# EAGLE board PCA9306_Breakout-Panel-v14 (EAGLE 6.5.0), part 1 of 3
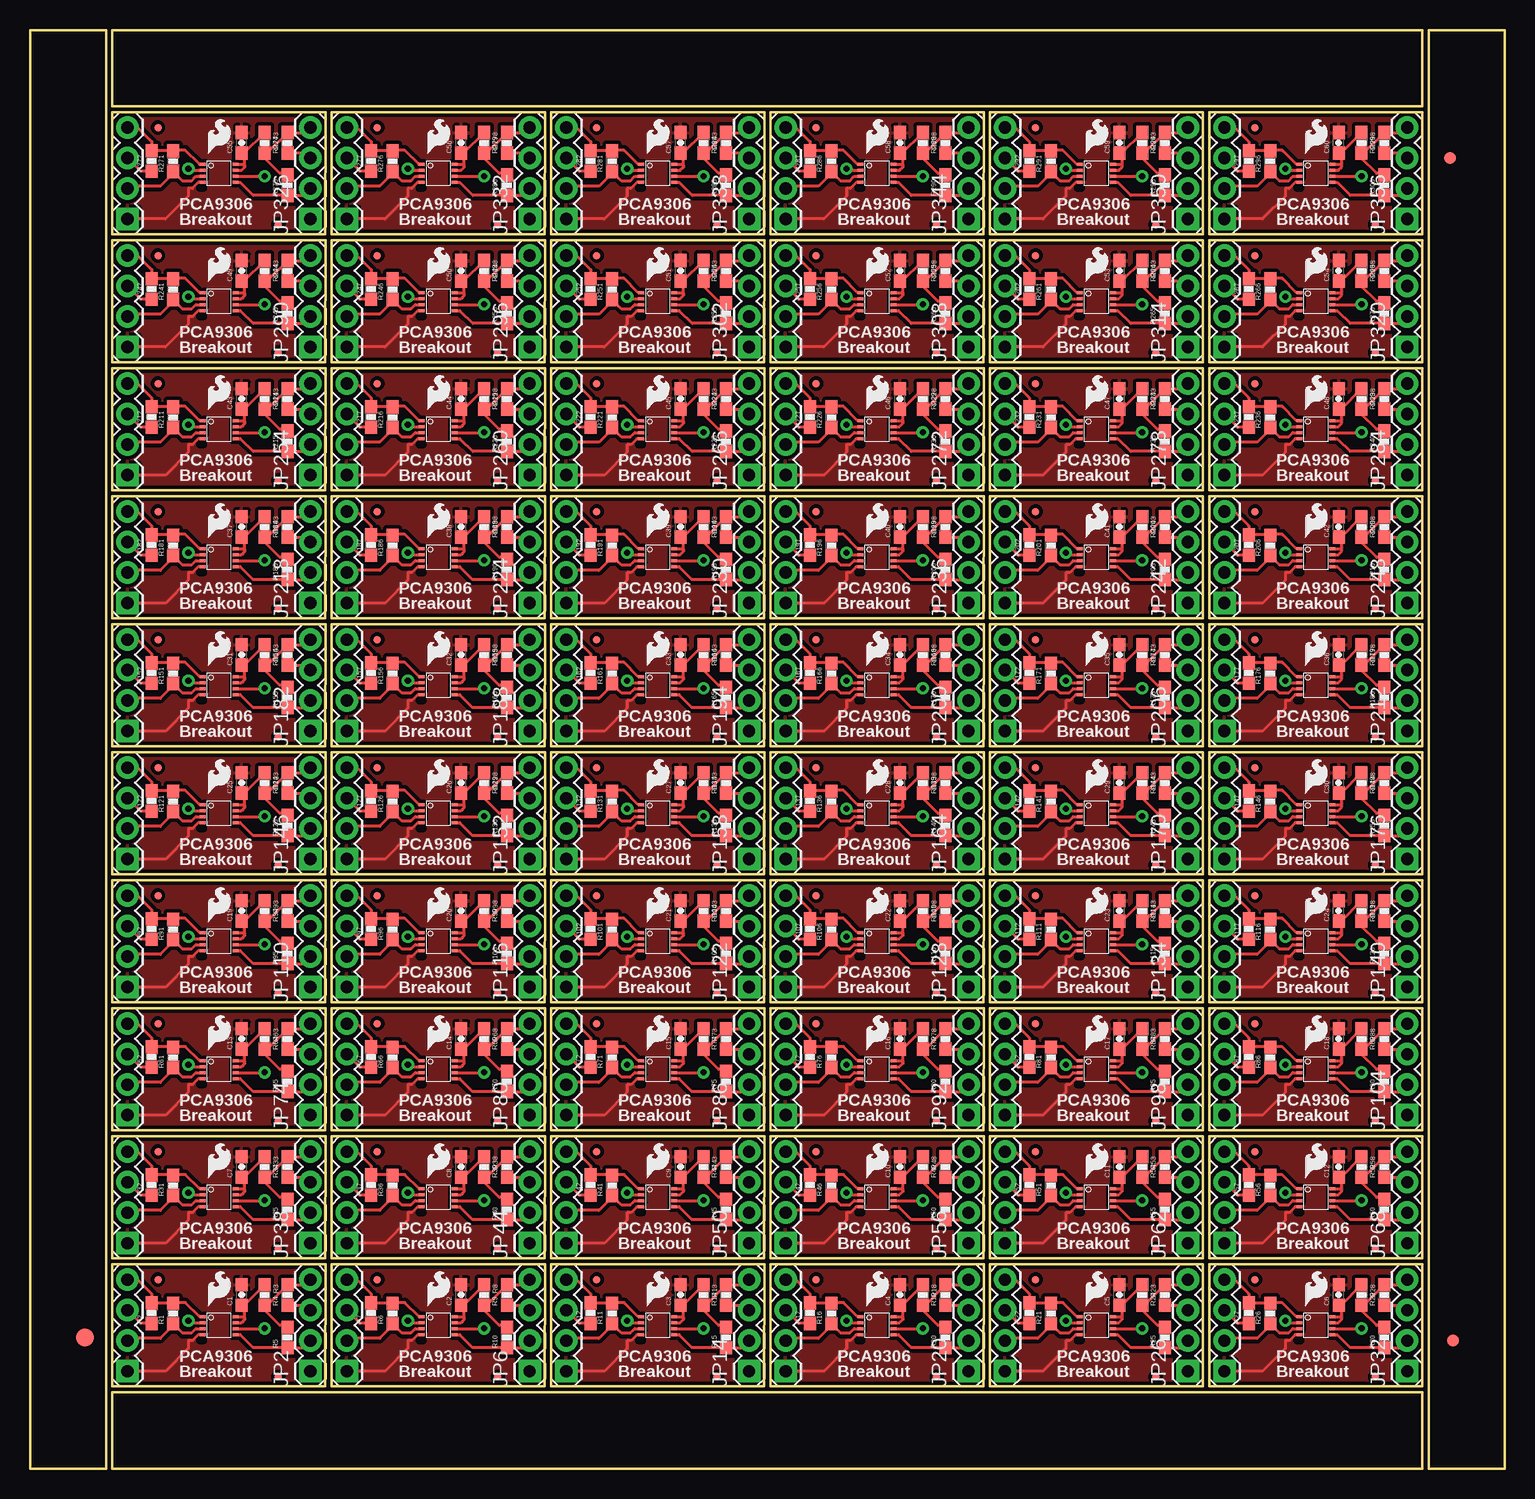
[diagram p0: board, top side]
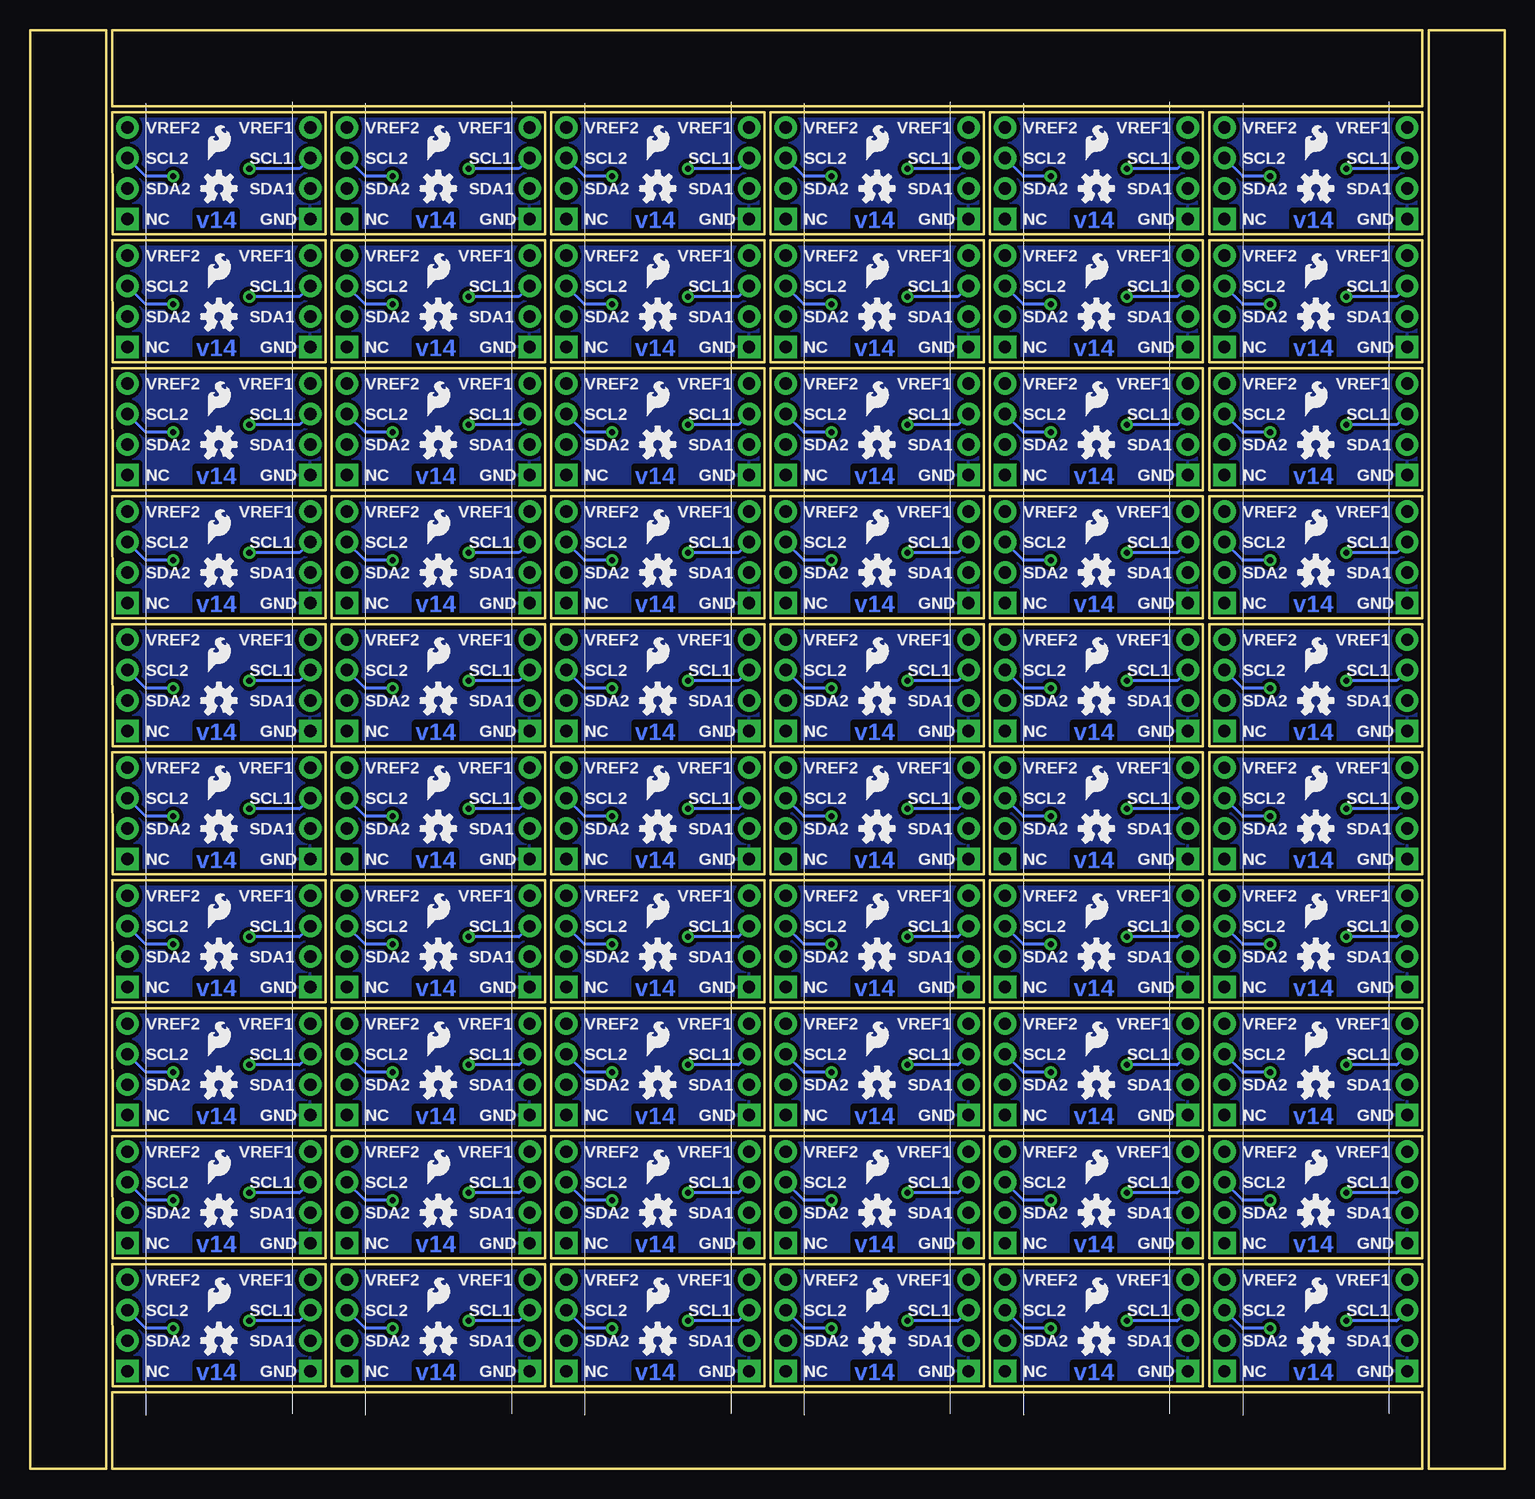
[diagram p1: board, bottom side, seen from below]

Size 122.94 x 119.89 mm. Coordinates in mm from the lower left corner, seen from the top.
Outline: 261 segments
Copper layers (1*16): Top 0.035mm / dielectric 1.5mm / Bottom 0.035mm
Design rules "SparkFun *": minimum track width 8mil, minimum drill 20mil, track to track 8mil, track to pad 8mil, pad to pad 8mil, via to via 8mil, smd to smd 8mil, copper to edge 8mil, drill to drill 8mil, minimum pad ring 12mil, minimum via ring 10mil, stop-mask expansion 4mil, vias tented up to drill 20mil, thermal gap 10mil
tRestrict: area 14.2,10.7 to 14.5,11; area 32.4,10.7 to 32.8,11; area 50.7,10.7 to 51.1,11; area 69,10.7 to 69.3,11; area 87.3,10.7 to 87.6,11; area 105.6,10.7 to 105.9,11; area 14.2,21.3 to 14.5,21.7; area 32.4,21.3 to 32.8,21.7; area 50.7,21.3 to 51.1,21.7; area 69,21.3 to 69.3,21.7; area 87.3,21.3 to 87.6,21.7; area 105.6,21.3 to 105.9,21.7; 48 more areas

## Footprints (pad centres in the part's own frame; a part is rotated, then mirrored left to right if it is on the bottom)
0603-CAP = smd 1.1 x 1: 1 -0.85,0; 2 0.85,0
FIDUCIAL-1.5X3 = smd 1.5 x 1.5: 1 0,0
FIDUCIAL-1X2 = smd 1 x 1: 1 0,0
1X04 = drill 1.016 pad 1.88 square: 1 0,0 | drill 1.016 pad 1.88: 2 2.54,0; 3 5.08,0; 4 7.62,0
FIDUCIAL-1X2.5 = smd 0.635 x 0.635: 1 0,0
0603-RES = smd 1.1 x 1: 1 -0.85,0; 2 0.85,0
PSOP-8 = smd 0.25 x 0.5: 1 -0.73,-1.37; 2 -0.23,-1.37; 3 0.27,-1.37; 4 0.77,-1.37; 5 0.77,1.38; 6 0.27,1.38; 7 -0.23,1.38; 8 -0.73,1.38

## Placement (x,y rotation side)
C1  0.1uF  [0603-CAP]  17.65,14.48 90 top
C2  0.1uF  [0603-CAP]  35.94,14.48 90 top
C3  0.1uF  [0603-CAP]  54.23,14.48 90 top
C4  0.1uF  [0603-CAP]  72.52,14.48 90 top
C5  0.1uF  [0603-CAP]  90.81,14.48 90 top
C6  0.1uF  [0603-CAP]  109.09,14.48 90 top
C7  0.1uF  [0603-CAP]  17.65,25.15 90 top
C8  0.1uF  [0603-CAP]  35.94,25.15 90 top
C9  0.1uF  [0603-CAP]  54.23,25.15 90 top
C10  0.1uF  [0603-CAP]  72.52,25.15 90 top
C11  0.1uF  [0603-CAP]  90.81,25.15 90 top
C12  0.1uF  [0603-CAP]  109.09,25.15 90 top
C13  0.1uF  [0603-CAP]  17.65,35.81 90 top
C14  0.1uF  [0603-CAP]  35.94,35.81 90 top
C15  0.1uF  [0603-CAP]  54.23,35.81 90 top
C16  0.1uF  [0603-CAP]  72.52,35.81 90 top
C17  0.1uF  [0603-CAP]  90.81,35.81 90 top
C18  0.1uF  [0603-CAP]  109.09,35.81 90 top
C19  0.1uF  [0603-CAP]  17.65,46.48 90 top
C20  0.1uF  [0603-CAP]  35.94,46.48 90 top
C21  0.1uF  [0603-CAP]  54.23,46.48 90 top
C22  0.1uF  [0603-CAP]  72.52,46.48 90 top
C23  0.1uF  [0603-CAP]  90.81,46.48 90 top
C24  0.1uF  [0603-CAP]  109.09,46.48 90 top
C25  0.1uF  [0603-CAP]  17.65,57.15 90 top
C26  0.1uF  [0603-CAP]  35.94,57.15 90 top
C27  0.1uF  [0603-CAP]  54.23,57.15 90 top
C28  0.1uF  [0603-CAP]  72.52,57.15 90 top
C29  0.1uF  [0603-CAP]  90.81,57.15 90 top
C30  0.1uF  [0603-CAP]  109.09,57.15 90 top
C31  0.1uF  [0603-CAP]  17.65,67.82 90 top
C32  0.1uF  [0603-CAP]  35.94,67.82 90 top
C33  0.1uF  [0603-CAP]  54.23,67.82 90 top
C34  0.1uF  [0603-CAP]  72.52,67.82 90 top
C35  0.1uF  [0603-CAP]  90.81,67.82 90 top
C36  0.1uF  [0603-CAP]  109.09,67.82 90 top
C37  0.1uF  [0603-CAP]  17.65,78.49 90 top
C38  0.1uF  [0603-CAP]  35.94,78.49 90 top
C39  0.1uF  [0603-CAP]  54.23,78.49 90 top
C40  0.1uF  [0603-CAP]  72.52,78.49 90 top
C41  0.1uF  [0603-CAP]  90.81,78.49 90 top
C42  0.1uF  [0603-CAP]  109.09,78.49 90 top
C43  0.1uF  [0603-CAP]  17.65,89.15 90 top
C44  0.1uF  [0603-CAP]  35.94,89.15 90 top
C45  0.1uF  [0603-CAP]  54.23,89.15 90 top
C46  0.1uF  [0603-CAP]  72.52,89.15 90 top
C47  0.1uF  [0603-CAP]  90.81,89.15 90 top
C48  0.1uF  [0603-CAP]  109.09,89.15 90 top
C49  0.1uF  [0603-CAP]  17.65,99.82 90 top
C50  0.1uF  [0603-CAP]  35.94,99.82 90 top
C51  0.1uF  [0603-CAP]  54.23,99.82 90 top
C52  0.1uF  [0603-CAP]  72.52,99.82 90 top
C53  0.1uF  [0603-CAP]  90.81,99.82 90 top
C54  0.1uF  [0603-CAP]  109.09,99.82 90 top
C55  0.1uF  [0603-CAP]  17.65,110.49 90 top
C56  0.1uF  [0603-CAP]  35.94,110.49 90 top
C57  0.1uF  [0603-CAP]  54.23,110.49 90 top
C58  0.1uF  [0603-CAP]  72.52,110.49 90 top
C59  0.1uF  [0603-CAP]  90.81,110.49 90 top
C60  0.1uF  [0603-CAP]  109.09,110.49 90 top
E$1  [FIDUCIAL-1.5X3]  4.57,10.92 0 top
E$4  [FIDUCIAL-1X2]  118.62,10.67 0 top
E$5  [FIDUCIAL-1X2]  118.36,109.22 180 top
JP1  [1X04]  8.13,8.13 90 top
JP2  [1X04]  23.37,8.13 90 top
JP3  LOGO-SFESK  [SFE-LOGO-FLAME]  14.86,13.59 0 top
JP4  LOGO-SFESK  [SFE-LOGO-FLAME]  16.64,13.08 0 bottom
JP5  [1X04]  26.42,8.13 90 top
JP6  [1X04]  41.66,8.13 90 top
JP7  FIDUCIAL1X2.5  [FIDUCIAL-1X2.5]  10.67,15.75 0 top
JP8  FIDUCIAL1X2.5  [FIDUCIAL-1X2.5]  20.7,7.65 0 top
JP9  LOGO-SFESK  [SFE-LOGO-FLAME]  33.15,13.59 0 top
JP10  LOGO-SFESK  [SFE-LOGO-FLAME]  34.92,13.08 0 bottom
JP11  FIDUCIAL1X2.5  [FIDUCIAL-1X2.5]  28.96,15.75 0 top
JP12  FIDUCIAL1X2.5  [FIDUCIAL-1X2.5]  38.99,7.65 0 top
JP13  [1X04]  44.7,8.13 90 top
JP14  [1X04]  59.94,8.13 90 top
JP15  LOGO-SFESK  [SFE-LOGO-FLAME]  51.43,13.59 0 top
JP16  LOGO-SFESK  [SFE-LOGO-FLAME]  53.21,13.08 0 bottom
JP17  FIDUCIAL1X2.5  [FIDUCIAL-1X2.5]  47.24,15.75 0 top
JP18  FIDUCIAL1X2.5  [FIDUCIAL-1X2.5]  57.28,7.65 0 top
JP19  [1X04]  62.99,8.13 90 top
JP20  [1X04]  78.23,8.13 90 top
JP21  LOGO-SFESK  [SFE-LOGO-FLAME]  69.72,13.59 0 top
JP22  LOGO-SFESK  [SFE-LOGO-FLAME]  71.5,13.08 0 bottom
JP23  FIDUCIAL1X2.5  [FIDUCIAL-1X2.5]  65.53,15.75 0 top
JP24  FIDUCIAL1X2.5  [FIDUCIAL-1X2.5]  75.56,7.65 0 top
JP25  [1X04]  81.28,8.13 90 top
JP26  [1X04]  96.52,8.13 90 top
JP27  LOGO-SFESK  [SFE-LOGO-FLAME]  88.01,13.59 0 top
JP28  LOGO-SFESK  [SFE-LOGO-FLAME]  89.79,13.08 0 bottom
JP29  FIDUCIAL1X2.5  [FIDUCIAL-1X2.5]  83.82,15.75 0 top
JP30  FIDUCIAL1X2.5  [FIDUCIAL-1X2.5]  93.85,7.65 0 top
JP31  [1X04]  99.57,8.13 90 top
JP32  [1X04]  114.81,8.13 90 top
JP33  LOGO-SFESK  [SFE-LOGO-FLAME]  106.3,13.59 0 top
JP34  LOGO-SFESK  [SFE-LOGO-FLAME]  108.08,13.08 0 bottom
JP35  FIDUCIAL1X2.5  [FIDUCIAL-1X2.5]  102.11,15.75 0 top
JP36  FIDUCIAL1X2.5  [FIDUCIAL-1X2.5]  112.14,7.65 0 top
JP37  [1X04]  8.13,18.8 90 top
JP38  [1X04]  23.37,18.8 90 top
JP39  LOGO-SFESK  [SFE-LOGO-FLAME]  14.86,24.26 0 top
JP40  LOGO-SFESK  [SFE-LOGO-FLAME]  16.64,23.75 0 bottom
JP41  FIDUCIAL1X2.5  [FIDUCIAL-1X2.5]  10.67,26.42 0 top
JP42  FIDUCIAL1X2.5  [FIDUCIAL-1X2.5]  20.7,18.32 0 top
JP43  [1X04]  26.42,18.8 90 top
JP44  [1X04]  41.66,18.8 90 top
JP45  LOGO-SFESK  [SFE-LOGO-FLAME]  33.15,24.26 0 top
JP46  LOGO-SFESK  [SFE-LOGO-FLAME]  34.92,23.75 0 bottom
JP47  FIDUCIAL1X2.5  [FIDUCIAL-1X2.5]  28.96,26.42 0 top
JP48  FIDUCIAL1X2.5  [FIDUCIAL-1X2.5]  38.99,18.32 0 top
JP49  [1X04]  44.7,18.8 90 top
JP50  [1X04]  59.94,18.8 90 top
JP51  LOGO-SFESK  [SFE-LOGO-FLAME]  51.43,24.26 0 top
JP52  LOGO-SFESK  [SFE-LOGO-FLAME]  53.21,23.75 0 bottom
JP53  FIDUCIAL1X2.5  [FIDUCIAL-1X2.5]  47.24,26.42 0 top
JP54  FIDUCIAL1X2.5  [FIDUCIAL-1X2.5]  57.28,18.32 0 top
JP55  [1X04]  62.99,18.8 90 top
JP56  [1X04]  78.23,18.8 90 top
JP57  LOGO-SFESK  [SFE-LOGO-FLAME]  69.72,24.26 0 top
JP58  LOGO-SFESK  [SFE-LOGO-FLAME]  71.5,23.75 0 bottom
JP59  FIDUCIAL1X2.5  [FIDUCIAL-1X2.5]  65.53,26.42 0 top
JP60  FIDUCIAL1X2.5  [FIDUCIAL-1X2.5]  75.56,18.32 0 top
JP61  [1X04]  81.28,18.8 90 top
JP62  [1X04]  96.52,18.8 90 top
JP63  LOGO-SFESK  [SFE-LOGO-FLAME]  88.01,24.26 0 top
JP64  LOGO-SFESK  [SFE-LOGO-FLAME]  89.79,23.75 0 bottom
JP65  FIDUCIAL1X2.5  [FIDUCIAL-1X2.5]  83.82,26.42 0 top
JP66  FIDUCIAL1X2.5  [FIDUCIAL-1X2.5]  93.85,18.32 0 top
JP67  [1X04]  99.57,18.8 90 top
JP68  [1X04]  114.81,18.8 90 top
JP69  LOGO-SFESK  [SFE-LOGO-FLAME]  106.3,24.26 0 top
JP70  LOGO-SFESK  [SFE-LOGO-FLAME]  108.08,23.75 0 bottom
JP71  FIDUCIAL1X2.5  [FIDUCIAL-1X2.5]  102.11,26.42 0 top
JP72  FIDUCIAL1X2.5  [FIDUCIAL-1X2.5]  112.14,18.32 0 top
JP73  [1X04]  8.13,29.46 90 top
JP74  [1X04]  23.37,29.46 90 top
JP75  LOGO-SFESK  [SFE-LOGO-FLAME]  14.86,34.92 0 top
JP76  LOGO-SFESK  [SFE-LOGO-FLAME]  16.64,34.42 0 bottom
JP77  FIDUCIAL1X2.5  [FIDUCIAL-1X2.5]  10.67,37.08 0 top
JP78  FIDUCIAL1X2.5  [FIDUCIAL-1X2.5]  20.7,28.99 0 top
JP79  [1X04]  26.42,29.46 90 top
JP80  [1X04]  41.66,29.46 90 top
JP81  LOGO-SFESK  [SFE-LOGO-FLAME]  33.15,34.92 0 top
JP82  LOGO-SFESK  [SFE-LOGO-FLAME]  34.92,34.42 0 bottom
JP83  FIDUCIAL1X2.5  [FIDUCIAL-1X2.5]  28.96,37.08 0 top
JP84  FIDUCIAL1X2.5  [FIDUCIAL-1X2.5]  38.99,28.99 0 top
JP85  [1X04]  44.7,29.46 90 top
JP86  [1X04]  59.94,29.46 90 top
JP87  LOGO-SFESK  [SFE-LOGO-FLAME]  51.43,34.92 0 top
JP88  LOGO-SFESK  [SFE-LOGO-FLAME]  53.21,34.42 0 bottom
JP89  FIDUCIAL1X2.5  [FIDUCIAL-1X2.5]  47.24,37.08 0 top
JP90  FIDUCIAL1X2.5  [FIDUCIAL-1X2.5]  57.28,28.99 0 top
JP91  [1X04]  62.99,29.46 90 top
JP92  [1X04]  78.23,29.46 90 top
JP93  LOGO-SFESK  [SFE-LOGO-FLAME]  69.72,34.92 0 top
JP94  LOGO-SFESK  [SFE-LOGO-FLAME]  71.5,34.42 0 bottom
JP95  FIDUCIAL1X2.5  [FIDUCIAL-1X2.5]  65.53,37.08 0 top
JP96  FIDUCIAL1X2.5  [FIDUCIAL-1X2.5]  75.56,28.99 0 top
JP97  [1X04]  81.28,29.46 90 top
JP98  [1X04]  96.52,29.46 90 top
JP99  LOGO-SFESK  [SFE-LOGO-FLAME]  88.01,34.92 0 top
JP100  LOGO-SFESK  [SFE-LOGO-FLAME]  89.79,34.42 0 bottom
JP101  FIDUCIAL1X2.5  [FIDUCIAL-1X2.5]  83.82,37.08 0 top
JP102  FIDUCIAL1X2.5  [FIDUCIAL-1X2.5]  93.85,28.99 0 top
JP103  [1X04]  99.57,29.46 90 top
JP104  [1X04]  114.81,29.46 90 top
JP105  LOGO-SFESK  [SFE-LOGO-FLAME]  106.3,34.92 0 top
JP106  LOGO-SFESK  [SFE-LOGO-FLAME]  108.08,34.42 0 bottom
JP107  FIDUCIAL1X2.5  [FIDUCIAL-1X2.5]  102.11,37.08 0 top
JP108  FIDUCIAL1X2.5  [FIDUCIAL-1X2.5]  112.14,28.99 0 top
JP109  [1X04]  8.13,40.13 90 top
JP110  [1X04]  23.37,40.13 90 top
JP111  LOGO-SFESK  [SFE-LOGO-FLAME]  14.86,45.59 0 top
JP112  LOGO-SFESK  [SFE-LOGO-FLAME]  16.64,45.08 0 bottom
JP113  FIDUCIAL1X2.5  [FIDUCIAL-1X2.5]  10.67,47.75 0 top
JP114  FIDUCIAL1X2.5  [FIDUCIAL-1X2.5]  20.7,39.66 0 top
JP115  [1X04]  26.42,40.13 90 top
JP116  [1X04]  41.66,40.13 90 top
JP117  LOGO-SFESK  [SFE-LOGO-FLAME]  33.15,45.59 0 top
JP118  LOGO-SFESK  [SFE-LOGO-FLAME]  34.92,45.08 0 bottom
JP119  FIDUCIAL1X2.5  [FIDUCIAL-1X2.5]  28.96,47.75 0 top
JP120  FIDUCIAL1X2.5  [FIDUCIAL-1X2.5]  38.99,39.66 0 top
JP121  [1X04]  44.7,40.13 90 top
JP122  [1X04]  59.94,40.13 90 top
JP123  LOGO-SFESK  [SFE-LOGO-FLAME]  51.43,45.59 0 top
JP124  LOGO-SFESK  [SFE-LOGO-FLAME]  53.21,45.08 0 bottom
JP125  FIDUCIAL1X2.5  [FIDUCIAL-1X2.5]  47.24,47.75 0 top
JP126  FIDUCIAL1X2.5  [FIDUCIAL-1X2.5]  57.28,39.66 0 top
JP127  [1X04]  62.99,40.13 90 top
JP128  [1X04]  78.23,40.13 90 top
JP129  LOGO-SFESK  [SFE-LOGO-FLAME]  69.72,45.59 0 top
JP130  LOGO-SFESK  [SFE-LOGO-FLAME]  71.5,45.08 0 bottom
JP131  FIDUCIAL1X2.5  [FIDUCIAL-1X2.5]  65.53,47.75 0 top
JP132  FIDUCIAL1X2.5  [FIDUCIAL-1X2.5]  75.56,39.66 0 top
JP133  [1X04]  81.28,40.13 90 top
JP134  [1X04]  96.52,40.13 90 top
JP135  LOGO-SFESK  [SFE-LOGO-FLAME]  88.01,45.59 0 top
JP136  LOGO-SFESK  [SFE-LOGO-FLAME]  89.79,45.08 0 bottom
JP137  FIDUCIAL1X2.5  [FIDUCIAL-1X2.5]  83.82,47.75 0 top
JP138  FIDUCIAL1X2.5  [FIDUCIAL-1X2.5]  93.85,39.66 0 top
JP139  [1X04]  99.57,40.13 90 top
JP140  [1X04]  114.81,40.13 90 top
JP141  LOGO-SFESK  [SFE-LOGO-FLAME]  106.3,45.59 0 top
JP142  LOGO-SFESK  [SFE-LOGO-FLAME]  108.08,45.08 0 bottom
JP143  FIDUCIAL1X2.5  [FIDUCIAL-1X2.5]  102.11,47.75 0 top
JP144  FIDUCIAL1X2.5  [FIDUCIAL-1X2.5]  112.14,39.66 0 top
JP145  [1X04]  8.13,50.8 90 top
JP146  [1X04]  23.37,50.8 90 top
JP147  LOGO-SFESK  [SFE-LOGO-FLAME]  14.86,56.26 0 top
JP148  LOGO-SFESK  [SFE-LOGO-FLAME]  16.64,55.75 0 bottom
JP149  FIDUCIAL1X2.5  [FIDUCIAL-1X2.5]  10.67,58.42 0 top
JP150  FIDUCIAL1X2.5  [FIDUCIAL-1X2.5]  20.7,50.32 0 top
JP151  [1X04]  26.42,50.8 90 top
JP152  [1X04]  41.66,50.8 90 top
JP153  LOGO-SFESK  [SFE-LOGO-FLAME]  33.15,56.26 0 top
JP154  LOGO-SFESK  [SFE-LOGO-FLAME]  34.92,55.75 0 bottom
JP155  FIDUCIAL1X2.5  [FIDUCIAL-1X2.5]  28.96,58.42 0 top
JP156  FIDUCIAL1X2.5  [FIDUCIAL-1X2.5]  38.99,50.32 0 top
JP157  [1X04]  44.7,50.8 90 top
JP158  [1X04]  59.94,50.8 90 top
JP159  LOGO-SFESK  [SFE-LOGO-FLAME]  51.43,56.26 0 top
JP160  LOGO-SFESK  [SFE-LOGO-FLAME]  53.21,55.75 0 bottom
JP161  FIDUCIAL1X2.5  [FIDUCIAL-1X2.5]  47.24,58.42 0 top
JP162  FIDUCIAL1X2.5  [FIDUCIAL-1X2.5]  57.28,50.32 0 top
JP163  [1X04]  62.99,50.8 90 top
JP164  [1X04]  78.23,50.8 90 top
JP165  LOGO-SFESK  [SFE-LOGO-FLAME]  69.72,56.26 0 top
JP166  LOGO-SFESK  [SFE-LOGO-FLAME]  71.5,55.75 0 bottom
JP167  FIDUCIAL1X2.5  [FIDUCIAL-1X2.5]  65.53,58.42 0 top
JP168  FIDUCIAL1X2.5  [FIDUCIAL-1X2.5]  75.56,50.32 0 top
JP169  [1X04]  81.28,50.8 90 top
JP170  [1X04]  96.52,50.8 90 top
JP171  LOGO-SFESK  [SFE-LOGO-FLAME]  88.01,56.26 0 top
JP172  LOGO-SFESK  [SFE-LOGO-FLAME]  89.79,55.75 0 bottom
JP173  FIDUCIAL1X2.5  [FIDUCIAL-1X2.5]  83.82,58.42 0 top
JP174  FIDUCIAL1X2.5  [FIDUCIAL-1X2.5]  93.85,50.32 0 top
JP175  [1X04]  99.57,50.8 90 top
JP176  [1X04]  114.81,50.8 90 top
JP177  LOGO-SFESK  [SFE-LOGO-FLAME]  106.3,56.26 0 top
JP178  LOGO-SFESK  [SFE-LOGO-FLAME]  108.08,55.75 0 bottom
JP179  FIDUCIAL1X2.5  [FIDUCIAL-1X2.5]  102.11,58.42 0 top
JP180  FIDUCIAL1X2.5  [FIDUCIAL-1X2.5]  112.14,50.32 0 top
JP181  [1X04]  8.13,61.47 90 top
JP182  [1X04]  23.37,61.47 90 top
JP183  LOGO-SFESK  [SFE-LOGO-FLAME]  14.86,66.93 0 top
JP184  LOGO-SFESK  [SFE-LOGO-FLAME]  16.64,66.42 0 bottom
JP185  FIDUCIAL1X2.5  [FIDUCIAL-1X2.5]  10.67,69.09 0 top
JP186  FIDUCIAL1X2.5  [FIDUCIAL-1X2.5]  20.7,60.99 0 top
JP187  [1X04]  26.42,61.47 90 top
JP188  [1X04]  41.66,61.47 90 top
JP189  LOGO-SFESK  [SFE-LOGO-FLAME]  33.15,66.93 0 top
JP190  LOGO-SFESK  [SFE-LOGO-FLAME]  34.92,66.42 0 bottom
JP191  FIDUCIAL1X2.5  [FIDUCIAL-1X2.5]  28.96,69.09 0 top
JP192  FIDUCIAL1X2.5  [FIDUCIAL-1X2.5]  38.99,60.99 0 top
JP193  [1X04]  44.7,61.47 90 top
JP194  [1X04]  59.94,61.47 90 top
JP195  LOGO-SFESK  [SFE-LOGO-FLAME]  51.43,66.93 0 top
JP196  LOGO-SFESK  [SFE-LOGO-FLAME]  53.21,66.42 0 bottom
JP197  FIDUCIAL1X2.5  [FIDUCIAL-1X2.5]  47.24,69.09 0 top
JP198  FIDUCIAL1X2.5  [FIDUCIAL-1X2.5]  57.28,60.99 0 top
JP199  [1X04]  62.99,61.47 90 top
JP200  [1X04]  78.23,61.47 90 top
JP201  LOGO-SFESK  [SFE-LOGO-FLAME]  69.72,66.93 0 top
JP202  LOGO-SFESK  [SFE-LOGO-FLAME]  71.5,66.42 0 bottom
JP203  FIDUCIAL1X2.5  [FIDUCIAL-1X2.5]  65.53,69.09 0 top
JP204  FIDUCIAL1X2.5  [FIDUCIAL-1X2.5]  75.56,60.99 0 top
JP205  [1X04]  81.28,61.47 90 top
JP206  [1X04]  96.52,61.47 90 top
JP207  LOGO-SFESK  [SFE-LOGO-FLAME]  88.01,66.93 0 top
JP208  LOGO-SFESK  [SFE-LOGO-FLAME]  89.79,66.42 0 bottom
JP209  FIDUCIAL1X2.5  [FIDUCIAL-1X2.5]  83.82,69.09 0 top
JP210  FIDUCIAL1X2.5  [FIDUCIAL-1X2.5]  93.85,60.99 0 top
JP211  [1X04]  99.57,61.47 90 top
JP212  [1X04]  114.81,61.47 90 top
JP213  LOGO-SFESK  [SFE-LOGO-FLAME]  106.3,66.93 0 top
JP214  LOGO-SFESK  [SFE-LOGO-FLAME]  108.08,66.42 0 bottom
JP215  FIDUCIAL1X2.5  [FIDUCIAL-1X2.5]  102.11,69.09 0 top
JP216  FIDUCIAL1X2.5  [FIDUCIAL-1X2.5]  112.14,60.99 0 top
JP217  [1X04]  8.13,72.14 90 top
JP218  [1X04]  23.37,72.14 90 top
JP219  LOGO-SFESK  [SFE-LOGO-FLAME]  14.86,77.6 0 top
JP220  LOGO-SFESK  [SFE-LOGO-FLAME]  16.64,77.09 0 bottom
JP221  FIDUCIAL1X2.5  [FIDUCIAL-1X2.5]  10.67,79.76 0 top
JP222  FIDUCIAL1X2.5  [FIDUCIAL-1X2.5]  20.7,71.66 0 top
JP223  [1X04]  26.42,72.14 90 top
JP224  [1X04]  41.66,72.14 90 top
JP225  LOGO-SFESK  [SFE-LOGO-FLAME]  33.15,77.6 0 top
JP226  LOGO-SFESK  [SFE-LOGO-FLAME]  34.92,77.09 0 bottom
JP227  FIDUCIAL1X2.5  [FIDUCIAL-1X2.5]  28.96,79.76 0 top
JP228  FIDUCIAL1X2.5  [FIDUCIAL-1X2.5]  38.99,71.66 0 top
JP229  [1X04]  44.7,72.14 90 top
JP230  [1X04]  59.94,72.14 90 top
JP231  LOGO-SFESK  [SFE-LOGO-FLAME]  51.43,77.6 0 top
JP232  LOGO-SFESK  [SFE-LOGO-FLAME]  53.21,77.09 0 bottom
JP233  FIDUCIAL1X2.5  [FIDUCIAL-1X2.5]  47.24,79.76 0 top
JP234  FIDUCIAL1X2.5  [FIDUCIAL-1X2.5]  57.28,71.66 0 top
JP235  [1X04]  62.99,72.14 90 top
JP236  [1X04]  78.23,72.14 90 top
JP237  LOGO-SFESK  [SFE-LOGO-FLAME]  69.72,77.6 0 top
JP238  LOGO-SFESK  [SFE-LOGO-FLAME]  71.5,77.09 0 bottom
JP239  FIDUCIAL1X2.5  [FIDUCIAL-1X2.5]  65.53,79.76 0 top
JP240  FIDUCIAL1X2.5  [FIDUCIAL-1X2.5]  75.56,71.66 0 top
JP241  [1X04]  81.28,72.14 90 top
JP242  [1X04]  96.52,72.14 90 top
JP243  LOGO-SFESK  [SFE-LOGO-FLAME]  88.01,77.6 0 top
JP244  LOGO-SFESK  [SFE-LOGO-FLAME]  89.79,77.09 0 bottom
JP245  FIDUCIAL1X2.5  [FIDUCIAL-1X2.5]  83.82,79.76 0 top
JP246  FIDUCIAL1X2.5  [FIDUCIAL-1X2.5]  93.85,71.66 0 top
JP247  [1X04]  99.57,72.14 90 top
JP248  [1X04]  114.81,72.14 90 top
JP249  LOGO-SFESK  [SFE-LOGO-FLAME]  106.3,77.6 0 top
JP250  LOGO-SFESK  [SFE-LOGO-FLAME]  108.08,77.09 0 bottom
JP251  FIDUCIAL1X2.5  [FIDUCIAL-1X2.5]  102.11,79.76 0 top
JP252  FIDUCIAL1X2.5  [FIDUCIAL-1X2.5]  112.14,71.66 0 top
JP253  [1X04]  8.13,82.8 90 top
JP254  [1X04]  23.37,82.8 90 top
JP255  LOGO-SFESK  [SFE-LOGO-FLAME]  14.86,88.27 0 top
JP256  LOGO-SFESK  [SFE-LOGO-FLAME]  16.64,87.76 0 bottom
JP257  FIDUCIAL1X2.5  [FIDUCIAL-1X2.5]  10.67,90.42 0 top
JP258  FIDUCIAL1X2.5  [FIDUCIAL-1X2.5]  20.7,82.33 0 top
JP259  [1X04]  26.42,82.8 90 top
JP260  [1X04]  41.66,82.8 90 top
JP261  LOGO-SFESK  [SFE-LOGO-FLAME]  33.15,88.27 0 top
JP262  LOGO-SFESK  [SFE-LOGO-FLAME]  34.92,87.76 0 bottom
JP263  FIDUCIAL1X2.5  [FIDUCIAL-1X2.5]  28.96,90.42 0 top
JP264  FIDUCIAL1X2.5  [FIDUCIAL-1X2.5]  38.99,82.33 0 top
JP265  [1X04]  44.7,82.8 90 top
JP266  [1X04]  59.94,82.8 90 top
JP267  LOGO-SFESK  [SFE-LOGO-FLAME]  51.43,88.27 0 top
JP268  LOGO-SFESK  [SFE-LOGO-FLAME]  53.21,87.76 0 bottom
JP269  FIDUCIAL1X2.5  [FIDUCIAL-1X2.5]  47.24,90.42 0 top
JP270  FIDUCIAL1X2.5  [FIDUCIAL-1X2.5]  57.28,82.33 0 top
JP271  [1X04]  62.99,82.8 90 top
JP272  [1X04]  78.23,82.8 90 top
JP273  LOGO-SFESK  [SFE-LOGO-FLAME]  69.72,88.27 0 top
JP274  LOGO-SFESK  [SFE-LOGO-FLAME]  71.5,87.76 0 bottom
JP275  FIDUCIAL1X2.5  [FIDUCIAL-1X2.5]  65.53,90.42 0 top
JP276  FIDUCIAL1X2.5  [FIDUCIAL-1X2.5]  75.56,82.33 0 top
JP277  [1X04]  81.28,82.8 90 top
JP278  [1X04]  96.52,82.8 90 top
JP279  LOGO-SFESK  [SFE-LOGO-FLAME]  88.01,88.27 0 top
JP280  LOGO-SFESK  [SFE-LOGO-FLAME]  89.79,87.76 0 bottom
JP281  FIDUCIAL1X2.5  [FIDUCIAL-1X2.5]  83.82,90.42 0 top
JP282  FIDUCIAL1X2.5  [FIDUCIAL-1X2.5]  93.85,82.33 0 top
JP283  [1X04]  99.57,82.8 90 top
JP284  [1X04]  114.81,82.8 90 top
JP285  LOGO-SFESK  [SFE-LOGO-FLAME]  106.3,88.27 0 top
JP286  LOGO-SFESK  [SFE-LOGO-FLAME]  108.08,87.76 0 bottom
JP287  FIDUCIAL1X2.5  [FIDUCIAL-1X2.5]  102.11,90.42 0 top
JP288  FIDUCIAL1X2.5  [FIDUCIAL-1X2.5]  112.14,82.33 0 top
JP289  [1X04]  8.13,93.47 90 top
JP290  [1X04]  23.37,93.47 90 top
JP291  LOGO-SFESK  [SFE-LOGO-FLAME]  14.86,98.93 0 top
JP292  LOGO-SFESK  [SFE-LOGO-FLAME]  16.64,98.42 0 bottom
JP293  FIDUCIAL1X2.5  [FIDUCIAL-1X2.5]  10.67,101.09 0 top
JP294  FIDUCIAL1X2.5  [FIDUCIAL-1X2.5]  20.7,93 0 top
JP295  [1X04]  26.42,93.47 90 top
JP296  [1X04]  41.66,93.47 90 top
JP297  LOGO-SFESK  [SFE-LOGO-FLAME]  33.15,98.93 0 top
JP298  LOGO-SFESK  [SFE-LOGO-FLAME]  34.92,98.42 0 bottom
JP299  FIDUCIAL1X2.5  [FIDUCIAL-1X2.5]  28.96,101.09 0 top
JP300  FIDUCIAL1X2.5  [FIDUCIAL-1X2.5]  38.99,93 0 top
JP301  [1X04]  44.7,93.47 90 top
JP302  [1X04]  59.94,93.47 90 top
JP303  LOGO-SFESK  [SFE-LOGO-FLAME]  51.43,98.93 0 top
JP304  LOGO-SFESK  [SFE-LOGO-FLAME]  53.21,98.42 0 bottom
JP305  FIDUCIAL1X2.5  [FIDUCIAL-1X2.5]  47.24,101.09 0 top
JP306  FIDUCIAL1X2.5  [FIDUCIAL-1X2.5]  57.28,93 0 top
JP307  [1X04]  62.99,93.47 90 top
JP308  [1X04]  78.23,93.47 90 top
JP309  LOGO-SFESK  [SFE-LOGO-FLAME]  69.72,98.93 0 top
JP310  LOGO-SFESK  [SFE-LOGO-FLAME]  71.5,98.42 0 bottom
JP311  FIDUCIAL1X2.5  [FIDUCIAL-1X2.5]  65.53,101.09 0 top
JP312  FIDUCIAL1X2.5  [FIDUCIAL-1X2.5]  75.56,93 0 top
JP313  [1X04]  81.28,93.47 90 top
JP314  [1X04]  96.52,93.47 90 top
JP315  LOGO-SFESK  [SFE-LOGO-FLAME]  88.01,98.93 0 top
JP316  LOGO-SFESK  [SFE-LOGO-FLAME]  89.79,98.42 0 bottom
JP317  FIDUCIAL1X2.5  [FIDUCIAL-1X2.5]  83.82,101.09 0 top
JP318  FIDUCIAL1X2.5  [FIDUCIAL-1X2.5]  93.85,93 0 top
JP319  [1X04]  99.57,93.47 90 top
JP320  [1X04]  114.81,93.47 90 top
JP321  LOGO-SFESK  [SFE-LOGO-FLAME]  106.3,98.93 0 top
JP322  LOGO-SFESK  [SFE-LOGO-FLAME]  108.08,98.42 0 bottom
JP323  FIDUCIAL1X2.5  [FIDUCIAL-1X2.5]  102.11,101.09 0 top
JP324  FIDUCIAL1X2.5  [FIDUCIAL-1X2.5]  112.14,93 0 top
JP325  [1X04]  8.13,104.14 90 top
JP326  [1X04]  23.37,104.14 90 top
JP327  LOGO-SFESK  [SFE-LOGO-FLAME]  14.86,109.6 0 top
JP328  LOGO-SFESK  [SFE-LOGO-FLAME]  16.64,109.09 0 bottom
JP329  FIDUCIAL1X2.5  [FIDUCIAL-1X2.5]  10.67,111.76 0 top
JP330  FIDUCIAL1X2.5  [FIDUCIAL-1X2.5]  20.7,103.66 0 top
JP331  [1X04]  26.42,104.14 90 top
JP332  [1X04]  41.66,104.14 90 top
JP333  LOGO-SFESK  [SFE-LOGO-FLAME]  33.15,109.6 0 top
JP334  LOGO-SFESK  [SFE-LOGO-FLAME]  34.92,109.09 0 bottom
JP335  FIDUCIAL1X2.5  [FIDUCIAL-1X2.5]  28.96,111.76 0 top
JP336  FIDUCIAL1X2.5  [FIDUCIAL-1X2.5]  38.99,103.66 0 top
JP337  [1X04]  44.7,104.14 90 top
JP338  [1X04]  59.94,104.14 90 top
JP339  LOGO-SFESK  [SFE-LOGO-FLAME]  51.43,109.6 0 top
JP340  LOGO-SFESK  [SFE-LOGO-FLAME]  53.21,109.09 0 bottom
JP341  FIDUCIAL1X2.5  [FIDUCIAL-1X2.5]  47.24,111.76 0 top
JP342  FIDUCIAL1X2.5  [FIDUCIAL-1X2.5]  57.28,103.66 0 top
JP343  [1X04]  62.99,104.14 90 top
JP344  [1X04]  78.23,104.14 90 top
JP345  LOGO-SFESK  [SFE-LOGO-FLAME]  69.72,109.6 0 top
JP346  LOGO-SFESK  [SFE-LOGO-FLAME]  71.5,109.09 0 bottom
JP347  FIDUCIAL1X2.5  [FIDUCIAL-1X2.5]  65.53,111.76 0 top
JP348  FIDUCIAL1X2.5  [FIDUCIAL-1X2.5]  75.56,103.66 0 top
JP349  [1X04]  81.28,104.14 90 top
JP350  [1X04]  96.52,104.14 90 top
JP351  LOGO-SFESK  [SFE-LOGO-FLAME]  88.01,109.6 0 top
JP352  LOGO-SFESK  [SFE-LOGO-FLAME]  89.79,109.09 0 bottom
JP353  FIDUCIAL1X2.5  [FIDUCIAL-1X2.5]  83.82,111.76 0 top
JP354  FIDUCIAL1X2.5  [FIDUCIAL-1X2.5]  93.85,103.66 0 top
JP355  [1X04]  99.57,104.14 90 top
JP356  [1X04]  114.81,104.14 90 top
JP357  LOGO-SFESK  [SFE-LOGO-FLAME]  106.3,109.6 0 top
JP358  LOGO-SFESK  [SFE-LOGO-FLAME]  108.08,109.09 0 bottom
JP359  FIDUCIAL1X2.5  [FIDUCIAL-1X2.5]  102.11,111.76 0 top
JP360  FIDUCIAL1X2.5  [FIDUCIAL-1X2.5]  112.14,103.66 0 top
LOGO1  OSHW-LOGOS  [OSHW-LOGO-S]  15.75,10.67 0 bottom
LOGO2  OSHW-LOGOS  [OSHW-LOGO-S]  34.04,10.67 0 bottom
LOGO3  OSHW-LOGOS  [OSHW-LOGO-S]  52.32,10.67 0 bottom
LOGO4  OSHW-LOGOS  [OSHW-LOGO-S]  70.61,10.67 0 bottom
LOGO5  OSHW-LOGOS  [OSHW-LOGO-S]  88.9,10.67 0 bottom
LOGO6  OSHW-LOGOS  [OSHW-LOGO-S]  107.19,10.67 0 bottom
LOGO7  OSHW-LOGOS  [OSHW-LOGO-S]  15.75,21.34 0 bottom
LOGO8  OSHW-LOGOS  [OSHW-LOGO-S]  34.04,21.34 0 bottom
LOGO9  OSHW-LOGOS  [OSHW-LOGO-S]  52.32,21.34 0 bottom
LOGO10  OSHW-LOGOS  [OSHW-LOGO-S]  70.61,21.34 0 bottom
LOGO11  OSHW-LOGOS  [OSHW-LOGO-S]  88.9,21.34 0 bottom
LOGO12  OSHW-LOGOS  [OSHW-LOGO-S]  107.19,21.34 0 bottom
LOGO13  OSHW-LOGOS  [OSHW-LOGO-S]  15.75,32 0 bottom
LOGO14  OSHW-LOGOS  [OSHW-LOGO-S]  34.04,32 0 bottom
LOGO15  OSHW-LOGOS  [OSHW-LOGO-S]  52.32,32 0 bottom
LOGO16  OSHW-LOGOS  [OSHW-LOGO-S]  70.61,32 0 bottom
LOGO17  OSHW-LOGOS  [OSHW-LOGO-S]  88.9,32 0 bottom
LOGO18  OSHW-LOGOS  [OSHW-LOGO-S]  107.19,32 0 bottom
LOGO19  OSHW-LOGOS  [OSHW-LOGO-S]  15.75,42.67 0 bottom
LOGO20  OSHW-LOGOS  [OSHW-LOGO-S]  34.04,42.67 0 bottom
LOGO21  OSHW-LOGOS  [OSHW-LOGO-S]  52.32,42.67 0 bottom
LOGO22  OSHW-LOGOS  [OSHW-LOGO-S]  70.61,42.67 0 bottom
LOGO23  OSHW-LOGOS  [OSHW-LOGO-S]  88.9,42.67 0 bottom
LOGO24  OSHW-LOGOS  [OSHW-LOGO-S]  107.19,42.67 0 bottom
LOGO25  OSHW-LOGOS  [OSHW-LOGO-S]  15.75,53.34 0 bottom
LOGO26  OSHW-LOGOS  [OSHW-LOGO-S]  34.04,53.34 0 bottom
LOGO27  OSHW-LOGOS  [OSHW-LOGO-S]  52.32,53.34 0 bottom
LOGO28  OSHW-LOGOS  [OSHW-LOGO-S]  70.61,53.34 0 bottom
LOGO29  OSHW-LOGOS  [OSHW-LOGO-S]  88.9,53.34 0 bottom
LOGO30  OSHW-LOGOS  [OSHW-LOGO-S]  107.19,53.34 0 bottom
LOGO31  OSHW-LOGOS  [OSHW-LOGO-S]  15.75,64.01 0 bottom
LOGO32  OSHW-LOGOS  [OSHW-LOGO-S]  34.04,64.01 0 bottom
LOGO33  OSHW-LOGOS  [OSHW-LOGO-S]  52.32,64.01 0 bottom
LOGO34  OSHW-LOGOS  [OSHW-LOGO-S]  70.61,64.01 0 bottom
LOGO35  OSHW-LOGOS  [OSHW-LOGO-S]  88.9,64.01 0 bottom
LOGO36  OSHW-LOGOS  [OSHW-LOGO-S]  107.19,64.01 0 bottom
LOGO37  OSHW-LOGOS  [OSHW-LOGO-S]  15.75,74.68 0 bottom
LOGO38  OSHW-LOGOS  [OSHW-LOGO-S]  34.04,74.68 0 bottom
LOGO39  OSHW-LOGOS  [OSHW-LOGO-S]  52.32,74.68 0 bottom
LOGO40  OSHW-LOGOS  [OSHW-LOGO-S]  70.61,74.68 0 bottom
LOGO41  OSHW-LOGOS  [OSHW-LOGO-S]  88.9,74.68 0 bottom
LOGO42  OSHW-LOGOS  [OSHW-LOGO-S]  107.19,74.68 0 bottom
LOGO43  OSHW-LOGOS  [OSHW-LOGO-S]  15.75,85.34 0 bottom
LOGO44  OSHW-LOGOS  [OSHW-LOGO-S]  34.04,85.34 0 bottom
LOGO45  OSHW-LOGOS  [OSHW-LOGO-S]  52.32,85.34 0 bottom
LOGO46  OSHW-LOGOS  [OSHW-LOGO-S]  70.61,85.34 0 bottom
LOGO47  OSHW-LOGOS  [OSHW-LOGO-S]  88.9,85.34 0 bottom
LOGO48  OSHW-LOGOS  [OSHW-LOGO-S]  107.19,85.34 0 bottom
LOGO49  OSHW-LOGOS  [OSHW-LOGO-S]  15.75,96.01 0 bottom
LOGO50  OSHW-LOGOS  [OSHW-LOGO-S]  34.04,96.01 0 bottom
LOGO51  OSHW-LOGOS  [OSHW-LOGO-S]  52.32,96.01 0 bottom
LOGO52  OSHW-LOGOS  [OSHW-LOGO-S]  70.61,96.01 0 bottom
LOGO53  OSHW-LOGOS  [OSHW-LOGO-S]  88.9,96.01 0 bottom
LOGO54  OSHW-LOGOS  [OSHW-LOGO-S]  107.19,96.01 0 bottom
LOGO55  OSHW-LOGOS  [OSHW-LOGO-S]  15.75,106.68 0 bottom
LOGO56  OSHW-LOGOS  [OSHW-LOGO-S]  34.04,106.68 0 bottom
LOGO57  OSHW-LOGOS  [OSHW-LOGO-S]  52.32,106.68 0 bottom
LOGO58  OSHW-LOGOS  [OSHW-LOGO-S]  70.61,106.68 0 bottom
LOGO59  OSHW-LOGOS  [OSHW-LOGO-S]  88.9,106.68 0 bottom
LOGO60  OSHW-LOGOS  [OSHW-LOGO-S]  107.19,106.68 0 bottom
R1  1k  [0603-RES]  11.94,12.94 90 top
R2  1k  [0603-RES]  10.16,12.95 90 top
R3  200k  [0603-RES]  19.56,14.48 270 top
R4  1k  [0603-RES]  21.46,14.48 90 top
R5  1k  [0603-RES]  21.46,10.94 90 top
R6  1k  [0603-RES]  30.23,12.94 90 top
R7  1k  [0603-RES]  28.45,12.95 90 top
R8  200k  [0603-RES]  37.85,14.48 270 top
R9  1k  [0603-RES]  39.75,14.48 90 top
R10  1k  [0603-RES]  39.75,10.94 90 top
R11  1k  [0603-RES]  48.51,12.94 90 top
R12  1k  [0603-RES]  46.74,12.95 90 top
R13  200k  [0603-RES]  56.13,14.48 270 top
R14  1k  [0603-RES]  58.04,14.48 90 top
R15  1k  [0603-RES]  58.04,10.94 90 top
R16  1k  [0603-RES]  66.8,12.94 90 top
R17  1k  [0603-RES]  65.02,12.95 90 top
R18  200k  [0603-RES]  74.42,14.48 270 top
R19  1k  [0603-RES]  76.33,14.48 90 top
R20  1k  [0603-RES]  76.33,10.94 90 top
R21  1k  [0603-RES]  85.09,12.94 90 top
R22  1k  [0603-RES]  83.31,12.95 90 top
R23  200k  [0603-RES]  92.71,14.48 270 top
R24  1k  [0603-RES]  94.62,14.48 90 top
R25  1k  [0603-RES]  94.62,10.94 90 top
R26  1k  [0603-RES]  103.38,12.94 90 top
R27  1k  [0603-RES]  101.6,12.95 90 top
R28  200k  [0603-RES]  111,14.48 270 top
R29  1k  [0603-RES]  112.9,14.48 90 top
R30  1k  [0603-RES]  112.9,10.94 90 top
R31  1k  [0603-RES]  11.94,23.61 90 top
R32  1k  [0603-RES]  10.16,23.62 90 top
R33  200k  [0603-RES]  19.56,25.15 270 top
R34  1k  [0603-RES]  21.46,25.15 90 top
R35  1k  [0603-RES]  21.46,21.61 90 top
R36  1k  [0603-RES]  30.23,23.61 90 top
R37  1k  [0603-RES]  28.45,23.62 90 top
R38  200k  [0603-RES]  37.85,25.15 270 top
R39  1k  [0603-RES]  39.75,25.15 90 top
R40  1k  [0603-RES]  39.75,21.61 90 top
R41  1k  [0603-RES]  48.51,23.61 90 top
R42  1k  [0603-RES]  46.74,23.62 90 top
R43  200k  [0603-RES]  56.13,25.15 270 top
R44  1k  [0603-RES]  58.04,25.15 90 top
R45  1k  [0603-RES]  58.04,21.61 90 top
R46  1k  [0603-RES]  66.8,23.61 90 top
R47  1k  [0603-RES]  65.02,23.62 90 top
R48  200k  [0603-RES]  74.42,25.15 270 top
R49  1k  [0603-RES]  76.33,25.15 90 top
R50  1k  [0603-RES]  76.33,21.61 90 top
R51  1k  [0603-RES]  85.09,23.61 90 top
R52  1k  [0603-RES]  83.31,23.62 90 top
R53  200k  [0603-RES]  92.71,25.15 270 top
R54  1k  [0603-RES]  94.62,25.15 90 top
R55  1k  [0603-RES]  94.62,21.61 90 top
R56  1k  [0603-RES]  103.38,23.61 90 top
R57  1k  [0603-RES]  101.6,23.62 90 top
R58  200k  [0603-RES]  111,25.15 270 top
R59  1k  [0603-RES]  112.9,25.15 90 top
R60  1k  [0603-RES]  112.9,21.61 90 top
R61  1k  [0603-RES]  11.94,34.27 90 top
R62  1k  [0603-RES]  10.16,34.29 90 top
R63  200k  [0603-RES]  19.56,35.81 270 top
R64  1k  [0603-RES]  21.46,35.81 90 top
R65  1k  [0603-RES]  21.46,32.27 90 top
R66  1k  [0603-RES]  30.23,34.27 90 top
R67  1k  [0603-RES]  28.45,34.29 90 top
R68  200k  [0603-RES]  37.85,35.81 270 top
R69  1k  [0603-RES]  39.75,35.81 90 top
R70  1k  [0603-RES]  39.75,32.27 90 top
R71  1k  [0603-RES]  48.51,34.27 90 top
R72  1k  [0603-RES]  46.74,34.29 90 top
R73  200k  [0603-RES]  56.13,35.81 270 top
R74  1k  [0603-RES]  58.04,35.81 90 top
R75  1k  [0603-RES]  58.04,32.27 90 top
R76  1k  [0603-RES]  66.8,34.27 90 top
R77  1k  [0603-RES]  65.02,34.29 90 top
R78  200k  [0603-RES]  74.42,35.81 270 top
R79  1k  [0603-RES]  76.33,35.81 90 top
R80  1k  [0603-RES]  76.33,32.27 90 top
R81  1k  [0603-RES]  85.09,34.27 90 top
R82  1k  [0603-RES]  83.31,34.29 90 top
R83  200k  [0603-RES]  92.71,35.81 270 top
R84  1k  [0603-RES]  94.62,35.81 90 top
R85  1k  [0603-RES]  94.62,32.27 90 top
R86  1k  [0603-RES]  103.38,34.27 90 top
R87  1k  [0603-RES]  101.6,34.29 90 top
R88  200k  [0603-RES]  111,35.81 270 top
R89  1k  [0603-RES]  112.9,35.81 90 top
R90  1k  [0603-RES]  112.9,32.27 90 top
R91  1k  [0603-RES]  11.94,44.94 90 top
R92  1k  [0603-RES]  10.16,44.96 90 top
R93  200k  [0603-RES]  19.56,46.48 270 top
R94  1k  [0603-RES]  21.46,46.48 90 top
R95  1k  [0603-RES]  21.46,42.94 90 top
R96  1k  [0603-RES]  30.23,44.94 90 top
R97  1k  [0603-RES]  28.45,44.96 90 top
R98  200k  [0603-RES]  37.85,46.48 270 top
R99  1k  [0603-RES]  39.75,46.48 90 top
R100  1k  [0603-RES]  39.75,42.94 90 top
R101  1k  [0603-RES]  48.51,44.94 90 top
R102  1k  [0603-RES]  46.74,44.96 90 top
R103  200k  [0603-RES]  56.13,46.48 270 top
R104  1k  [0603-RES]  58.04,46.48 90 top
R105  1k  [0603-RES]  58.04,42.94 90 top
R106  1k  [0603-RES]  66.8,44.94 90 top
R107  1k  [0603-RES]  65.02,44.96 90 top
R108  200k  [0603-RES]  74.42,46.48 270 top
R109  1k  [0603-RES]  76.33,46.48 90 top
R110  1k  [0603-RES]  76.33,42.94 90 top
R111  1k  [0603-RES]  85.09,44.94 90 top
R112  1k  [0603-RES]  83.31,44.96 90 top
R113  200k  [0603-RES]  92.71,46.48 270 top
R114  1k  [0603-RES]  94.62,46.48 90 top
R115  1k  [0603-RES]  94.62,42.94 90 top
R116  1k  [0603-RES]  103.38,44.94 90 top
R117  1k  [0603-RES]  101.6,44.96 90 top
R118  200k  [0603-RES]  111,46.48 270 top
R119  1k  [0603-RES]  112.9,46.48 90 top
R120  1k  [0603-RES]  112.9,42.94 90 top
R121  1k  [0603-RES]  11.94,55.61 90 top
R122  1k  [0603-RES]  10.16,55.63 90 top
R123  200k  [0603-RES]  19.56,57.15 270 top
R124  1k  [0603-RES]  21.46,57.15 90 top
R125  1k  [0603-RES]  21.46,53.61 90 top
R126  1k  [0603-RES]  30.23,55.61 90 top
R127  1k  [0603-RES]  28.45,55.63 90 top
R128  200k  [0603-RES]  37.85,57.15 270 top
R129  1k  [0603-RES]  39.75,57.15 90 top
R130  1k  [0603-RES]  39.75,53.61 90 top
R131  1k  [0603-RES]  48.51,55.61 90 top
R132  1k  [0603-RES]  46.74,55.63 90 top
R133  200k  [0603-RES]  56.13,57.15 270 top
R134  1k  [0603-RES]  58.04,57.15 90 top
R135  1k  [0603-RES]  58.04,53.61 90 top
R136  1k  [0603-RES]  66.8,55.61 90 top
R137  1k  [0603-RES]  65.02,55.63 90 top
R138  200k  [0603-RES]  74.42,57.15 270 top
R139  1k  [0603-RES]  76.33,57.15 90 top
R140  1k  [0603-RES]  76.33,53.61 90 top
R141  1k  [0603-RES]  85.09,55.61 90 top
R142  1k  [0603-RES]  83.31,55.63 90 top
R143  200k  [0603-RES]  92.71,57.15 270 top
R144  1k  [0603-RES]  94.62,57.15 90 top
R145  1k  [0603-RES]  94.62,53.61 90 top
R146  1k  [0603-RES]  103.38,55.61 90 top
R147  1k  [0603-RES]  101.6,55.63 90 top
R148  200k  [0603-RES]  111,57.15 270 top
R149  1k  [0603-RES]  112.9,57.15 90 top
R150  1k  [0603-RES]  112.9,53.61 90 top
R151  1k  [0603-RES]  11.94,66.28 90 top
R152  1k  [0603-RES]  10.16,66.29 90 top
R153  200k  [0603-RES]  19.56,67.82 270 top
R154  1k  [0603-RES]  21.46,67.82 90 top
R155  1k  [0603-RES]  21.46,64.28 90 top
R156  1k  [0603-RES]  30.23,66.28 90 top
R157  1k  [0603-RES]  28.45,66.29 90 top
R158  200k  [0603-RES]  37.85,67.82 270 top
R159  1k  [0603-RES]  39.75,67.82 90 top
R160  1k  [0603-RES]  39.75,64.28 90 top
R161  1k  [0603-RES]  48.51,66.28 90 top
R162  1k  [0603-RES]  46.74,66.29 90 top
R163  200k  [0603-RES]  56.13,67.82 270 top
R164  1k  [0603-RES]  58.04,67.82 90 top
R165  1k  [0603-RES]  58.04,64.28 90 top
R166  1k  [0603-RES]  66.8,66.28 90 top
R167  1k  [0603-RES]  65.02,66.29 90 top
R168  200k  [0603-RES]  74.42,67.82 270 top
R169  1k  [0603-RES]  76.33,67.82 90 top
R170  1k  [0603-RES]  76.33,64.28 90 top
R171  1k  [0603-RES]  85.09,66.28 90 top
R172  1k  [0603-RES]  83.31,66.29 90 top
R173  200k  [0603-RES]  92.71,67.82 270 top
R174  1k  [0603-RES]  94.62,67.82 90 top
R175  1k  [0603-RES]  94.62,64.28 90 top
R176  1k  [0603-RES]  103.38,66.28 90 top
R177  1k  [0603-RES]  101.6,66.29 90 top
R178  200k  [0603-RES]  111,67.82 270 top
R179  1k  [0603-RES]  112.9,67.82 90 top
R180  1k  [0603-RES]  112.9,64.28 90 top
R181  1k  [0603-RES]  11.94,76.95 90 top
R182  1k  [0603-RES]  10.16,76.96 90 top
R183  200k  [0603-RES]  19.56,78.49 270 top
R184  1k  [0603-RES]  21.46,78.49 90 top
R185  1k  [0603-RES]  21.46,74.95 90 top
R186  1k  [0603-RES]  30.23,76.95 90 top
R187  1k  [0603-RES]  28.45,76.96 90 top
R188  200k  [0603-RES]  37.85,78.49 270 top
R189  1k  [0603-RES]  39.75,78.49 90 top
R190  1k  [0603-RES]  39.75,74.95 90 top
R191  1k  [0603-RES]  48.51,76.95 90 top
R192  1k  [0603-RES]  46.74,76.96 90 top
R193  200k  [0603-RES]  56.13,78.49 270 top
R194  1k  [0603-RES]  58.04,78.49 90 top
R195  1k  [0603-RES]  58.04,74.95 90 top
R196  1k  [0603-RES]  66.8,76.95 90 top
R197  1k  [0603-RES]  65.02,76.96 90 top
R198  200k  [0603-RES]  74.42,78.49 270 top
R199  1k  [0603-RES]  76.33,78.49 90 top
R200  1k  [0603-RES]  76.33,74.95 90 top
R201  1k  [0603-RES]  85.09,76.95 90 top
R202  1k  [0603-RES]  83.31,76.96 90 top
R203  200k  [0603-RES]  92.71,78.49 270 top
R204  1k  [0603-RES]  94.62,78.49 90 top
R205  1k  [0603-RES]  94.62,74.95 90 top
R206  1k  [0603-RES]  103.38,76.95 90 top
R207  1k  [0603-RES]  101.6,76.96 90 top
R208  200k  [0603-RES]  111,78.49 270 top
R209  1k  [0603-RES]  112.9,78.49 90 top
R210  1k  [0603-RES]  112.9,74.95 90 top
R211  1k  [0603-RES]  11.94,87.61 90 top
R212  1k  [0603-RES]  10.16,87.63 90 top
R213  200k  [0603-RES]  19.56,89.15 270 top
R214  1k  [0603-RES]  21.46,89.15 90 top
R215  1k  [0603-RES]  21.46,85.61 90 top
R216  1k  [0603-RES]  30.23,87.61 90 top
R217  1k  [0603-RES]  28.45,87.63 90 top
R218  200k  [0603-RES]  37.85,89.15 270 top
R219  1k  [0603-RES]  39.75,89.15 90 top
R220  1k  [0603-RES]  39.75,85.61 90 top
R221  1k  [0603-RES]  48.51,87.61 90 top
R222  1k  [0603-RES]  46.74,87.63 90 top
R223  200k  [0603-RES]  56.13,89.15 270 top
R224  1k  [0603-RES]  58.04,89.15 90 top
R225  1k  [0603-RES]  58.04,85.61 90 top
R226  1k  [0603-RES]  66.8,87.61 90 top
R227  1k  [0603-RES]  65.02,87.63 90 top
R228  200k  [0603-RES]  74.42,89.15 270 top
R229  1k  [0603-RES]  76.33,89.15 90 top
R230  1k  [0603-RES]  76.33,85.61 90 top
R231  1k  [0603-RES]  85.09,87.61 90 top
R232  1k  [0603-RES]  83.31,87.63 90 top
R233  200k  [0603-RES]  92.71,89.15 270 top
R234  1k  [0603-RES]  94.62,89.15 90 top
R235  1k  [0603-RES]  94.62,85.61 90 top
R236  1k  [0603-RES]  103.38,87.61 90 top
R237  1k  [0603-RES]  101.6,87.63 90 top
R238  200k  [0603-RES]  111,89.15 270 top
R239  1k  [0603-RES]  112.9,89.15 90 top
R240  1k  [0603-RES]  112.9,85.61 90 top
R241  1k  [0603-RES]  11.94,98.28 90 top
R242  1k  [0603-RES]  10.16,98.3 90 top
R243  200k  [0603-RES]  19.56,99.82 270 top
R244  1k  [0603-RES]  21.46,99.82 90 top
R245  1k  [0603-RES]  21.46,96.28 90 top
R246  1k  [0603-RES]  30.23,98.28 90 top
R247  1k  [0603-RES]  28.45,98.3 90 top
R248  200k  [0603-RES]  37.85,99.82 270 top
R249  1k  [0603-RES]  39.75,99.82 90 top
R250  1k  [0603-RES]  39.75,96.28 90 top
R251  1k  [0603-RES]  48.51,98.28 90 top
R252  1k  [0603-RES]  46.74,98.3 90 top
R253  200k  [0603-RES]  56.13,99.82 270 top
R254  1k  [0603-RES]  58.04,99.82 90 top
R255  1k  [0603-RES]  58.04,96.28 90 top
R256  1k  [0603-RES]  66.8,98.28 90 top
R257  1k  [0603-RES]  65.02,98.3 90 top
R258  200k  [0603-RES]  74.42,99.82 270 top
R259  1k  [0603-RES]  76.33,99.82 90 top
R260  1k  [0603-RES]  76.33,96.28 90 top
R261  1k  [0603-RES]  85.09,98.28 90 top
R262  1k  [0603-RES]  83.31,98.3 90 top
R263  200k  [0603-RES]  92.71,99.82 270 top
R264  1k  [0603-RES]  94.62,99.82 90 top
R265  1k  [0603-RES]  94.62,96.28 90 top
R266  1k  [0603-RES]  103.38,98.28 90 top
R267  1k  [0603-RES]  101.6,98.3 90 top
R268  200k  [0603-RES]  111,99.82 270 top
R269  1k  [0603-RES]  112.9,99.82 90 top
R270  1k  [0603-RES]  112.9,96.28 90 top
R271  1k  [0603-RES]  11.94,108.95 90 top
R272  1k  [0603-RES]  10.16,108.97 90 top
R273  200k  [0603-RES]  19.56,110.49 270 top
R274  1k  [0603-RES]  21.46,110.49 90 top
R275  1k  [0603-RES]  21.46,106.95 90 top
R276  1k  [0603-RES]  30.23,108.95 90 top
R277  1k  [0603-RES]  28.45,108.97 90 top
R278  200k  [0603-RES]  37.85,110.49 270 top
R279  1k  [0603-RES]  39.75,110.49 90 top
R280  1k  [0603-RES]  39.75,106.95 90 top
R281  1k  [0603-RES]  48.51,108.95 90 top
R282  1k  [0603-RES]  46.74,108.97 90 top
R283  200k  [0603-RES]  56.13,110.49 270 top
R284  1k  [0603-RES]  58.04,110.49 90 top
R285  1k  [0603-RES]  58.04,106.95 90 top
R286  1k  [0603-RES]  66.8,108.95 90 top
R287  1k  [0603-RES]  65.02,108.97 90 top
R288  200k  [0603-RES]  74.42,110.49 270 top
R289  1k  [0603-RES]  76.33,110.49 90 top
R290  1k  [0603-RES]  76.33,106.95 90 top
R291  1k  [0603-RES]  85.09,108.95 90 top
R292  1k  [0603-RES]  83.31,108.97 90 top
R293  200k  [0603-RES]  92.71,110.49 270 top
R294  1k  [0603-RES]  94.62,110.49 90 top
R295  1k  [0603-RES]  94.62,106.95 90 top
R296  1k  [0603-RES]  103.38,108.95 90 top
R297  1k  [0603-RES]  101.6,108.97 90 top
R298  200k  [0603-RES]  111,110.49 270 top
R299  1k  [0603-RES]  112.9,110.49 90 top
R300  1k  [0603-RES]  112.9,106.95 90 top
U$1  [PSOP-8]  15.75,11.94 270 top
U$2  [PSOP-8]  34.04,11.94 270 top
U$3  [PSOP-8]  52.32,11.94 270 top
U$4  [PSOP-8]  70.61,11.94 270 top
U$5  [PSOP-8]  88.9,11.94 270 top
U$6  [PSOP-8]  107.19,11.94 270 top
U$7  [PSOP-8]  15.75,22.61 270 top
U$8  [PSOP-8]  34.04,22.61 270 top
U$9  [PSOP-8]  52.32,22.61 270 top
U$10  [PSOP-8]  70.61,22.61 270 top
U$11  [PSOP-8]  88.9,22.61 270 top
U$12  [PSOP-8]  107.19,22.61 270 top
U$13  [PSOP-8]  15.75,33.27 270 top
U$14  [PSOP-8]  34.04,33.27 270 top
U$15  [PSOP-8]  52.32,33.27 270 top
U$16  [PSOP-8]  70.61,33.27 270 top
U$17  [PSOP-8]  88.9,33.27 270 top
U$18  [PSOP-8]  107.19,33.27 270 top
U$19  [PSOP-8]  15.75,43.94 270 top
U$20  [PSOP-8]  34.04,43.94 270 top
U$21  [PSOP-8]  52.32,43.94 270 top
U$22  [PSOP-8]  70.61,43.94 270 top
U$23  [PSOP-8]  88.9,43.94 270 top
U$24  [PSOP-8]  107.19,43.94 270 top
U$25  [PSOP-8]  15.75,54.61 270 top
U$26  [PSOP-8]  34.04,54.61 270 top
U$27  [PSOP-8]  52.32,54.61 270 top
U$28  [PSOP-8]  70.61,54.61 270 top
U$29  [PSOP-8]  88.9,54.61 270 top
U$30  [PSOP-8]  107.19,54.61 270 top
U$31  [PSOP-8]  15.75,65.28 270 top
U$32  [PSOP-8]  34.04,65.28 270 top
U$33  [PSOP-8]  52.32,65.28 270 top
U$34  [PSOP-8]  70.61,65.28 270 top
U$35  [PSOP-8]  88.9,65.28 270 top
U$36  [PSOP-8]  107.19,65.28 270 top
U$37  [PSOP-8]  15.75,75.95 270 top
U$38  [PSOP-8]  34.04,75.95 270 top
U$39  [PSOP-8]  52.32,75.95 270 top
U$40  [PSOP-8]  70.61,75.95 270 top
U$41  [PSOP-8]  88.9,75.95 270 top
U$42  [PSOP-8]  107.19,75.95 270 top
U$43  [PSOP-8]  15.75,86.61 270 top
U$44  [PSOP-8]  34.04,86.61 270 top
U$45  [PSOP-8]  52.32,86.61 270 top
U$46  [PSOP-8]  70.61,86.61 270 top
U$47  [PSOP-8]  88.9,86.61 270 top
U$48  [PSOP-8]  107.19,86.61 270 top
U$49  [PSOP-8]  15.75,97.28 270 top
U$50  [PSOP-8]  34.04,97.28 270 top
U$51  [PSOP-8]  52.32,97.28 270 top
U$52  [PSOP-8]  70.61,97.28 270 top
U$53  [PSOP-8]  88.9,97.28 270 top
U$54  [PSOP-8]  107.19,97.28 270 top
U$55  [PSOP-8]  15.75,107.95 270 top
U$56  [PSOP-8]  34.04,107.95 270 top
U$57  [PSOP-8]  52.32,107.95 270 top
U$58  [PSOP-8]  70.61,107.95 270 top
U$59  [PSOP-8]  88.9,107.95 270 top
U$60  [PSOP-8]  107.19,107.95 270 top

## Library data of the parts
C1-C60 JP1-JP6 JP9 JP10 JP13-JP16 JP19-JP22 JP25-JP28 JP31-JP34 JP37-JP40 JP43-JP46 JP49-JP52 JP55-JP58 JP61-JP64 JP67-JP70 JP73-JP76 JP79-JP82 JP85-JP88 JP91-JP94 JP97-JP100 JP103-JP106 JP109-JP112 JP115-JP118 JP121-JP124 JP127-JP130 JP133-JP136 JP139-JP142 JP145-JP148 JP151-JP154 JP157-JP160 JP163-JP166 JP169-JP172 JP175-JP178 JP181-JP184 JP187-JP190 JP193-JP196 JP199-JP202 JP205-JP208 JP211-JP214 JP217-JP220 JP223-JP226 JP229-JP232 JP235-JP238 JP241-JP244 JP247-JP250 JP253-JP256 JP259-JP262 JP265-JP268 JP271-JP274 JP277-JP280 JP283-JP286 JP289-JP292 JP295-JP298 JP301-JP304 JP307-JP310 JP313-JP316 JP319-JP322 JP325-JP328 JP331-JP334 JP337-JP340 JP343-JP346 JP349-JP352 JP355-JP358 R1-R300 = SparkFun
E$1 E$4 E$5 LOGO1-LOGO60 = SparkFun-Aesthetics
JP7 JP8 JP11 JP12 JP17 JP18 JP23 JP24 JP29 JP30 JP35 JP36 JP41 JP42 JP47 JP48 JP53 JP54 JP59 JP60 JP65 JP66 JP71 JP72 JP77 JP78 JP83 JP84 JP89 JP90 JP95 JP96 JP101 JP102 JP107 JP108 JP113 JP114 JP119 JP120 JP125 JP126 JP131 JP132 JP137 JP138 JP143 JP144 JP149 JP150 JP155 JP156 JP161 JP162 JP167 JP168 JP173 JP174 JP179 JP180 JP185 JP186 JP191 JP192 JP197 JP198 JP203 JP204 JP209 JP210 JP215 JP216 JP221 JP222 JP227 JP228 JP233 JP234 JP239 JP240 JP245 JP246 JP251 JP252 JP257 JP258 JP263 JP264 JP269 JP270 JP275 JP276 JP281 JP282 JP287 JP288 JP293 JP294 JP299 JP300 JP305 JP306 JP311 JP312 JP317 JP318 JP323 JP324 JP329 JP330 JP335 JP336 JP341 JP342 JP347 JP348 JP353 JP354 JP359 JP360 = abes
U$1-U$60 = SparkFun-DigitalIC; PROD_ID: IC-10023